# Altium PCB ALio Embedded.PcbDoc (part 1 of 2)
Units mm, origin at the board's own origin, x right, y up, seen from the top; angles counter-clockwise.
Board outline 88.22 x 65.31 mm, 2 copper layers (Top Layer, Bottom Layer); 585 components, 0 nets, 3879 pads, 0 vias.
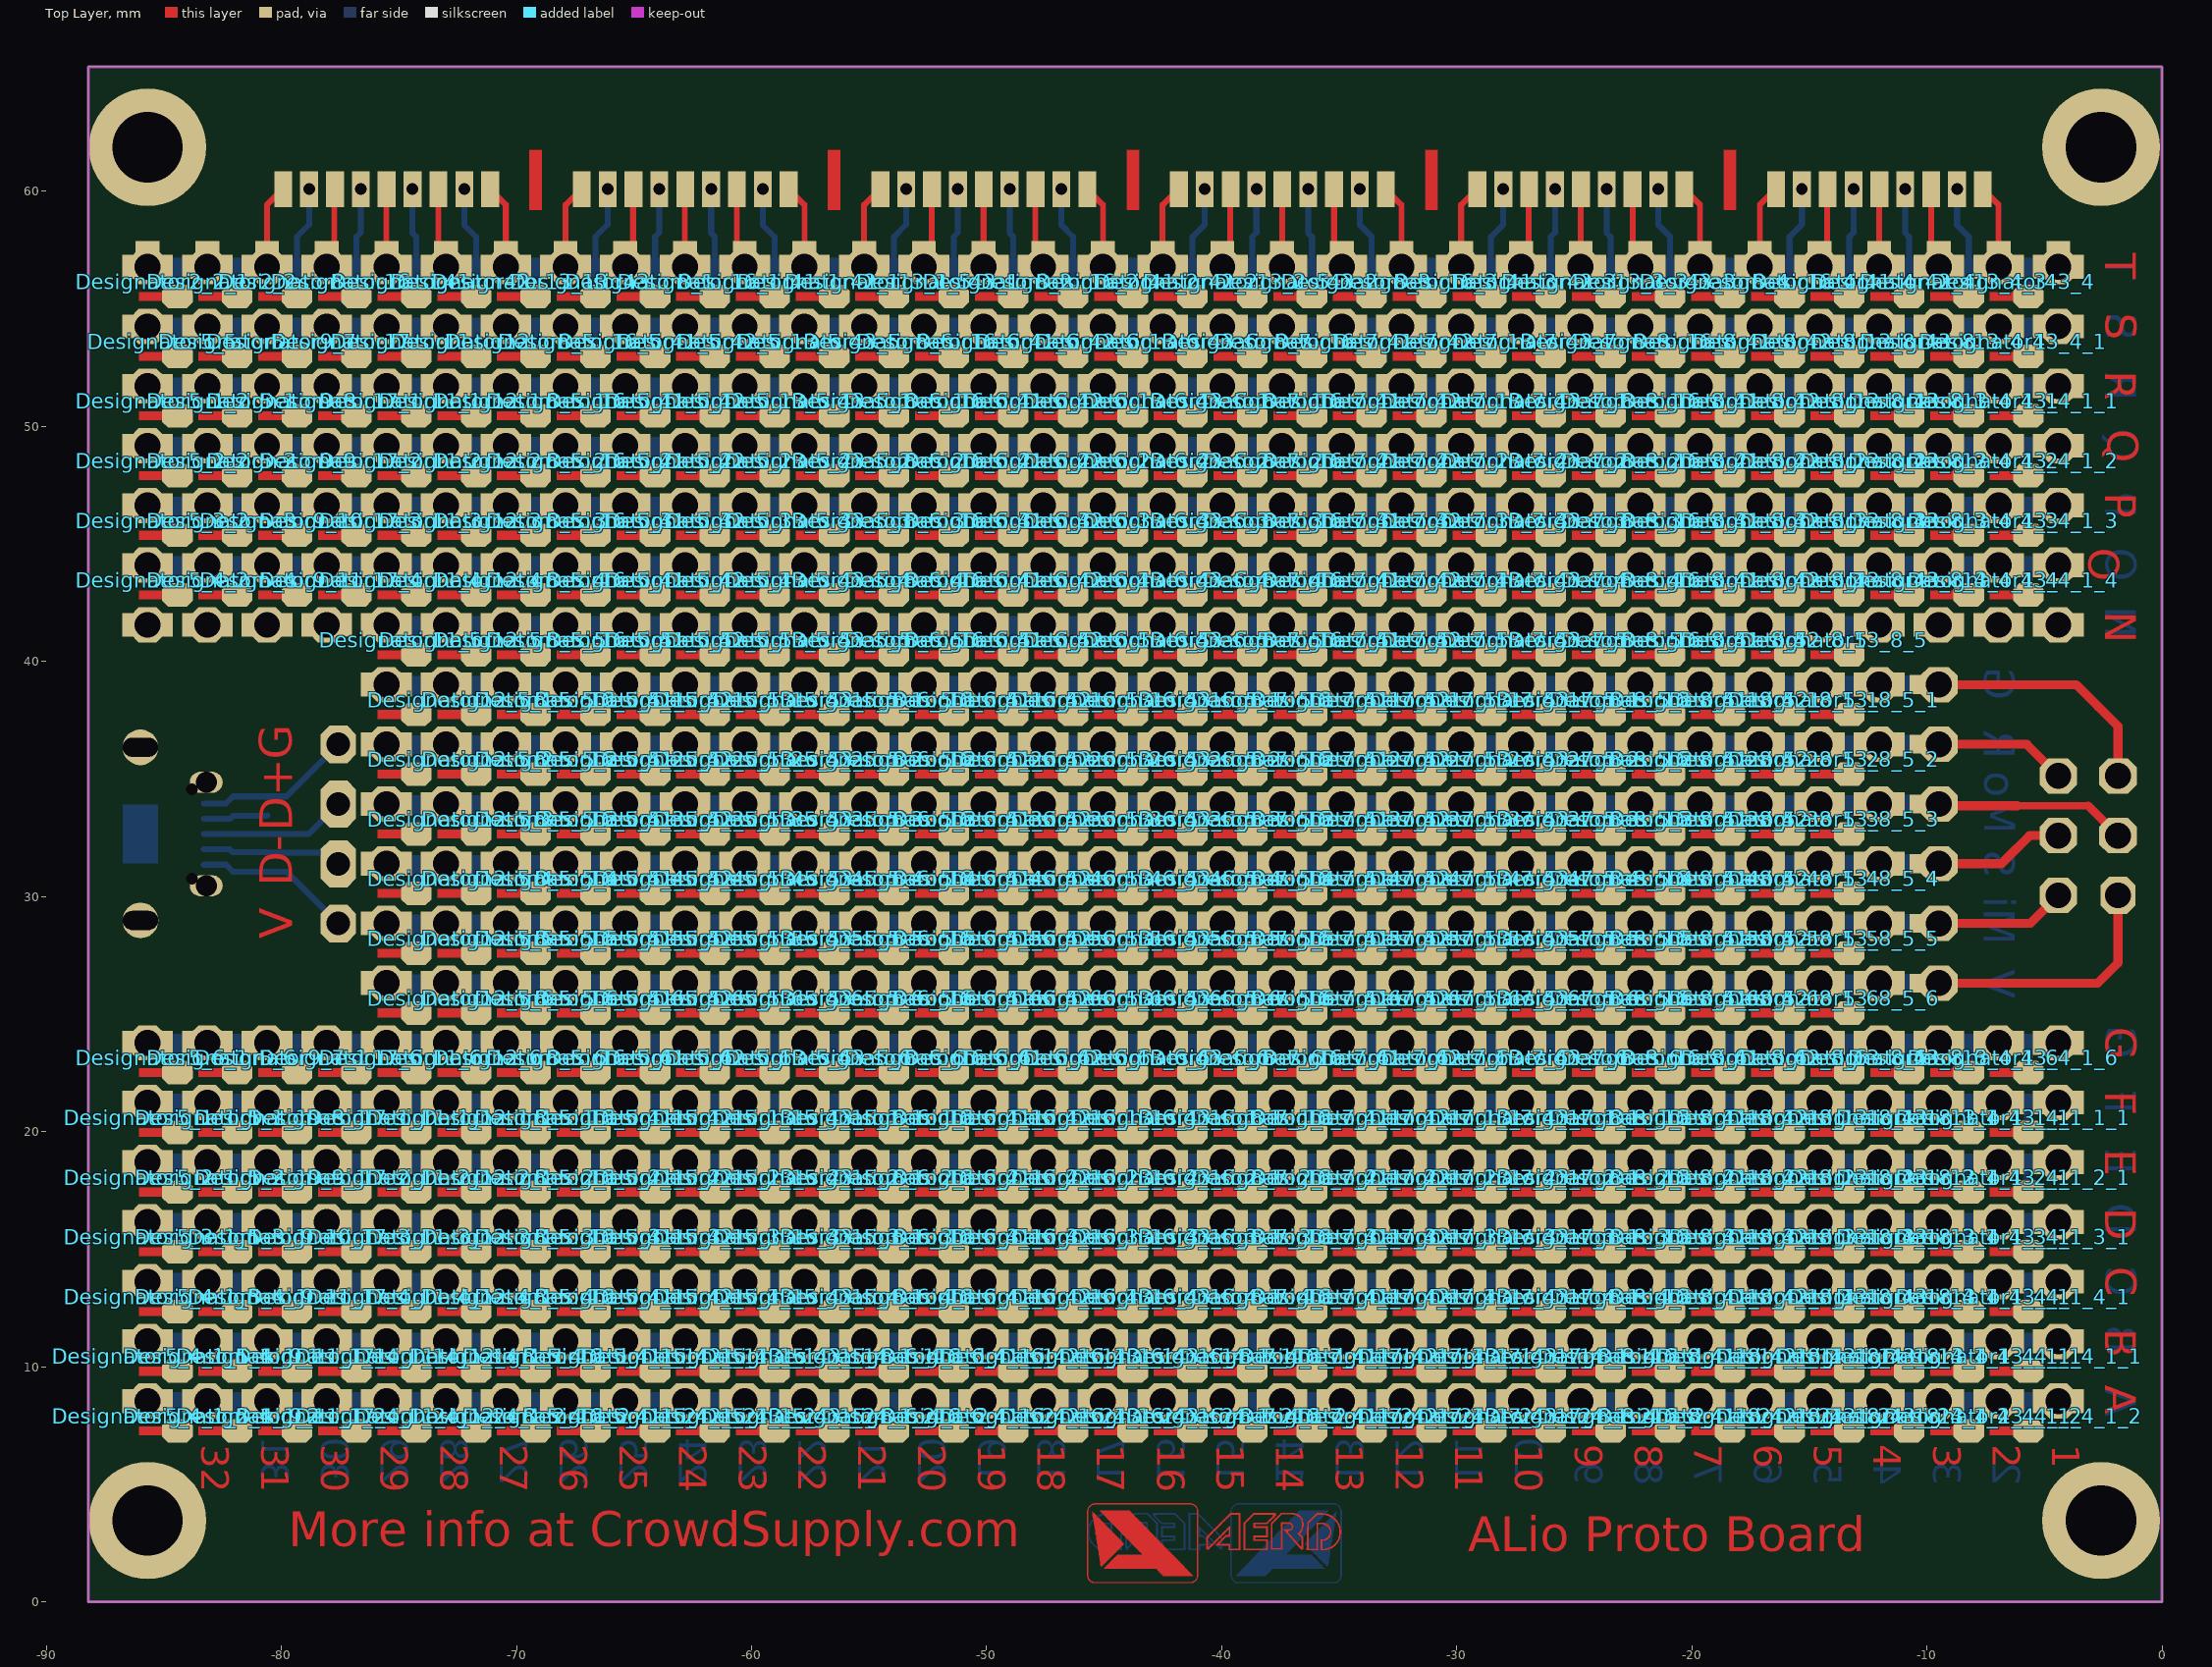
[diagram p0: Top Layer view]
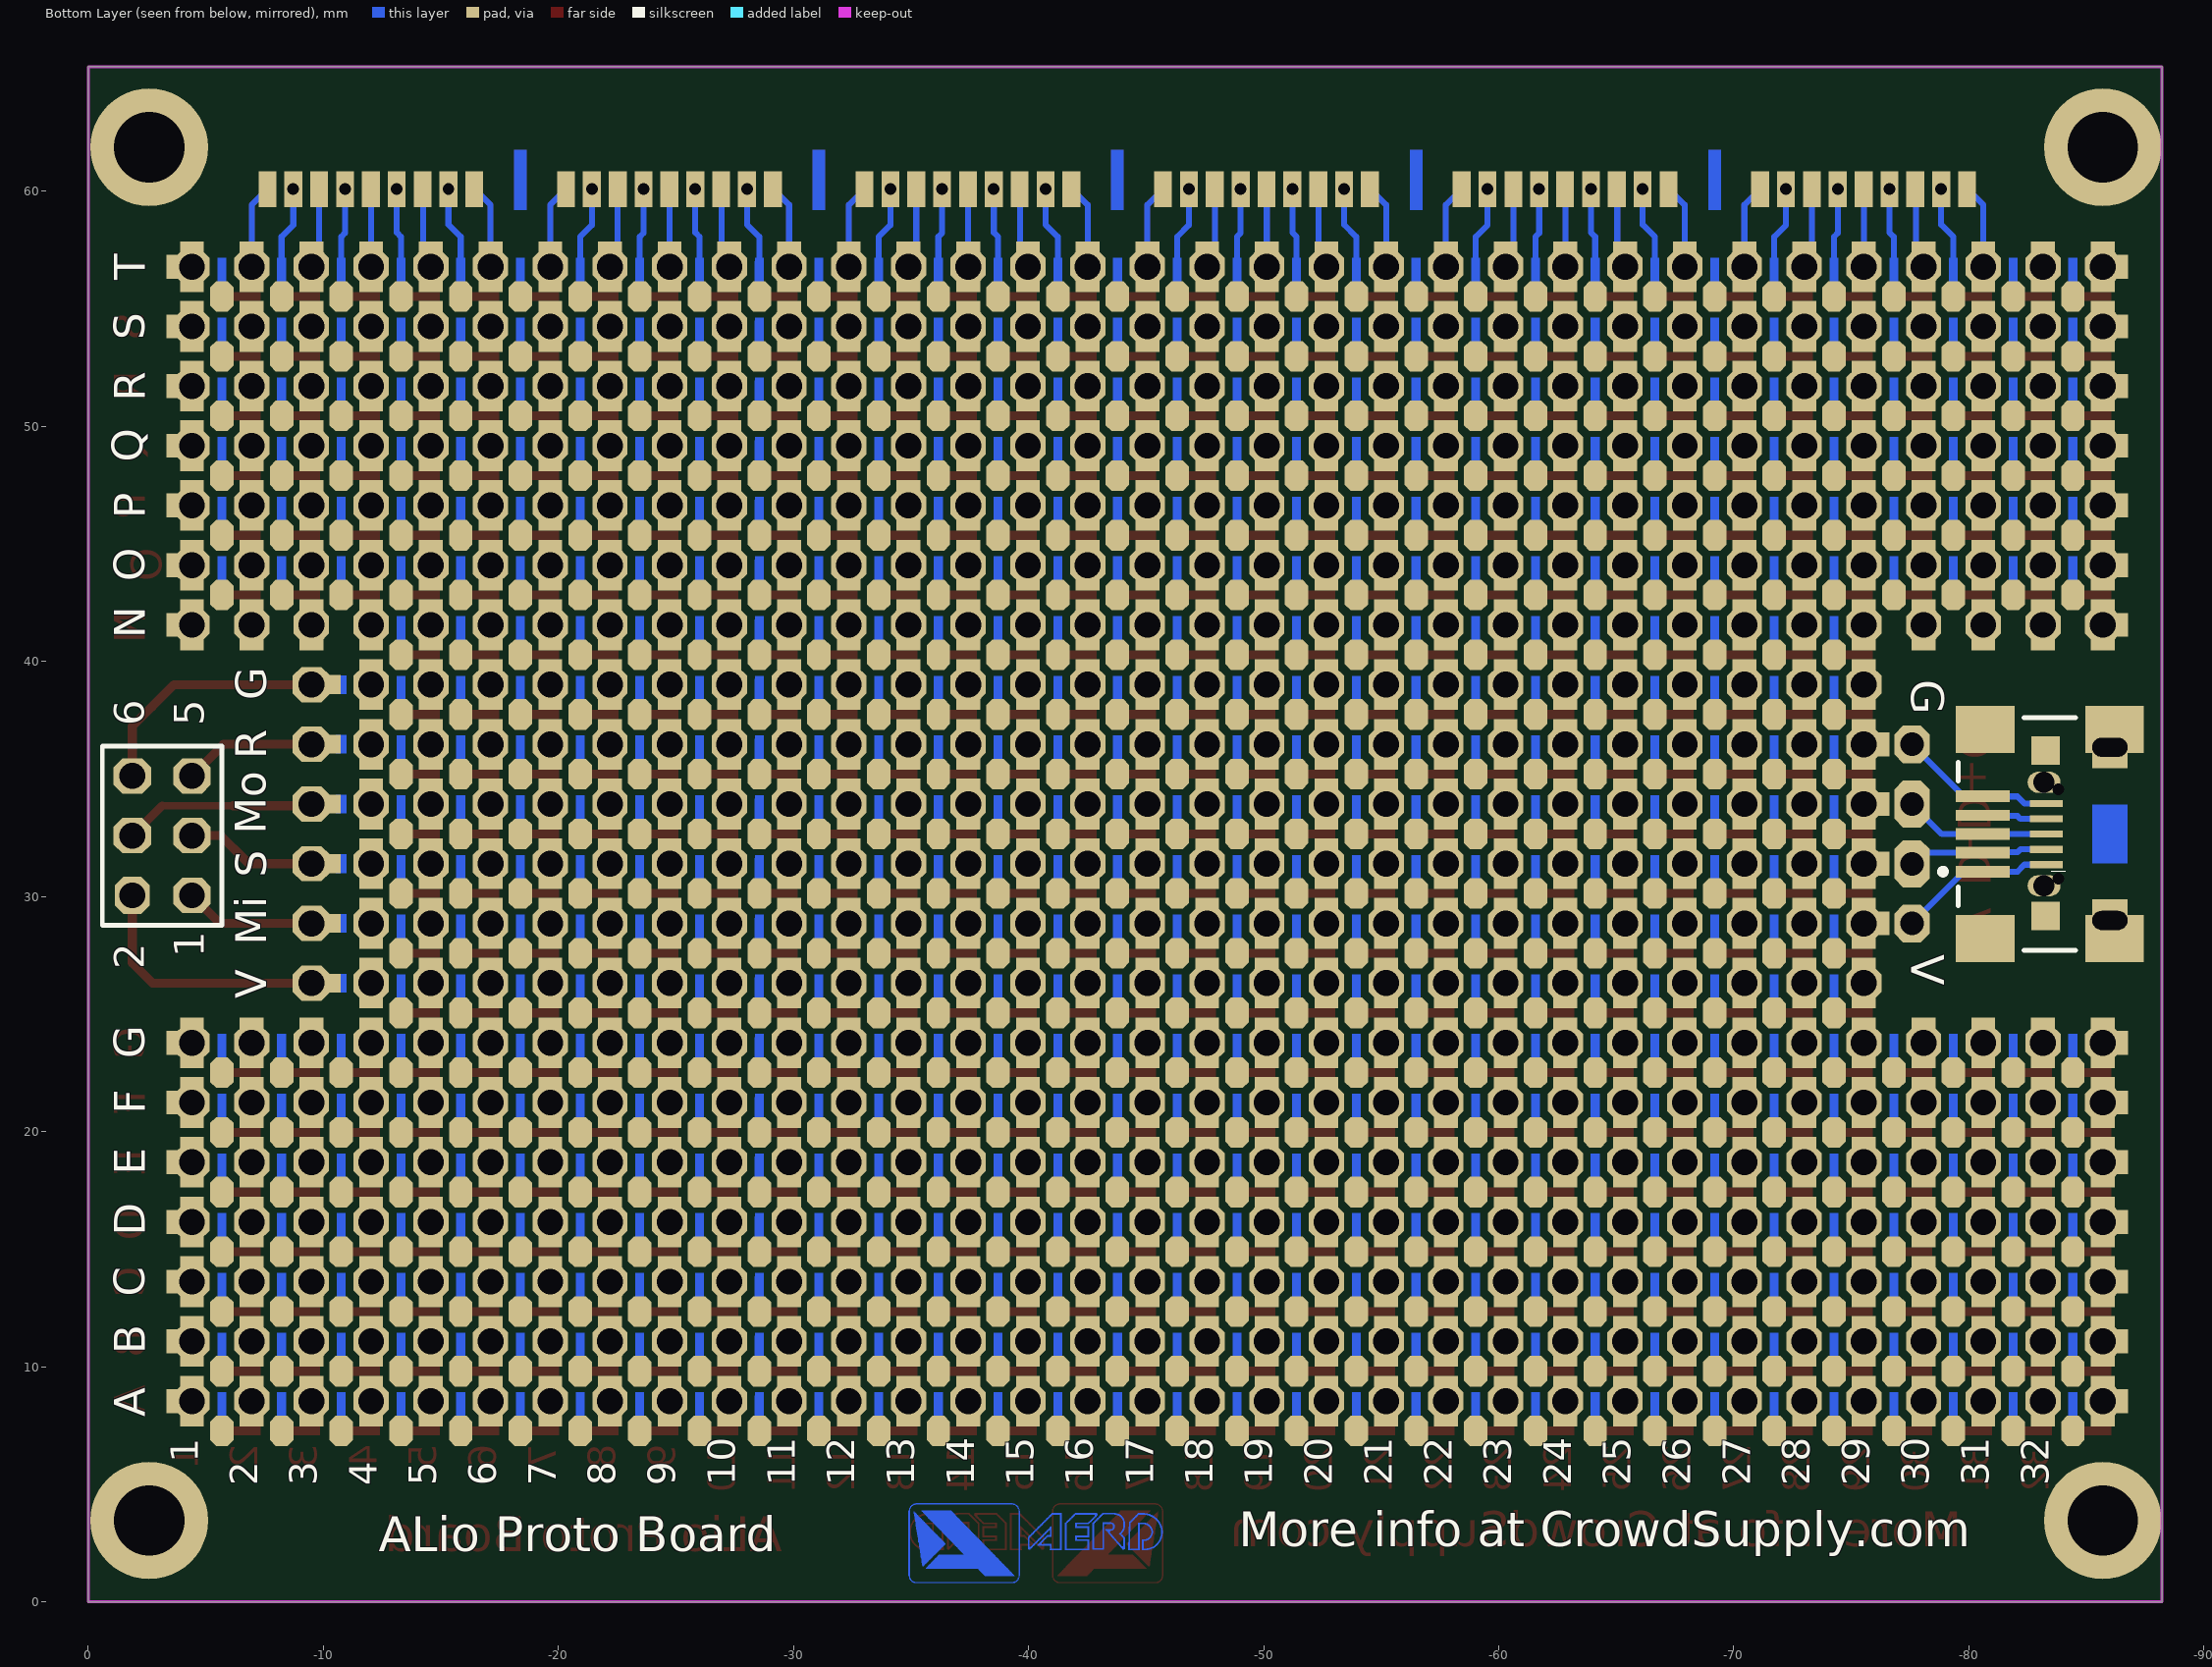
[diagram p1: Bottom Layer view, seen from below]

## Layer stack, top to bottom
Top Layer: signal copper 0.0356
Dielectric: dielectric 0.32, FR-4, Dk 4.8
Bottom Layer: signal copper 0.0356

## Board outline
0,65.31 -88.221,65.31 -88.221,0 0,0 0,17.96 0,65.31

## Design rules (kind name [scope] priority, off if disabled: settings)
Clearance [All] p1 off: gap=0.254
ComponentClearance [All] p1 off: gap=0.254 collisioncheckmode=3 verticalgap=0.254 showdistances=FALSE
HoleToHoleClearance [All] p1 off: gap=0.254 allowstackedmicrovias=TRUE
MinimumSolderMaskSliver [All] p1 off: minsoldermaskwidth=0.254
PlaneConnect [All] p1 off: planeconnectstyle=Relief reliefexpansion=0.508 reliefentries=4 reliefconductorwidth=0.254 reliefairgap=0.254
PolygonConnect [All] p1: connectstyle=Relief reliefconductorwidth=0.254 reliefentries=4 polygonreliefangle="90 Angle"
RoutingVias [All] p1: holewidth=0.711 width=1.27 viastyle="Through Hole" minholewidth=0.711 minwidth=1.27 maxholewidth=0.711 maxwidth=1.27
ShortCircuit [All] p1 off: allowed=FALSE
SilkscreenOverComponentPads [All] p1: minsilkscreentomaskgap=0.254
SolderMaskExpansion [All] p1: expansion=0.102
UnRoutedNet [All] p1 off:
Width [All] p1: maxlimit=0.508 minlimit=0.127 preferedwidth=0.254
21 further rules are at their usual default settings.

## Components (designator, comment, footprint, x,y, rotation, side; value= is the part's Value field where it differs from the comment)
Designator2_2 "Comment" PROTO2WL -83.155,56.8 r0 top
Designator2_2_1 "Comment" PROTO2WL -85.695,56.8 r0 top
Designator5 "Comment" PROTO2WL -83.155,54.26 r0 top
Designator5_1 "Comment" PROTO2WL -83.155,51.72 r0 top
Designator5_1_1 "Comment" PROTO2WL -83.155,21.24 r0 top
Designator5_1_1_1 "Comment" PROTO2WL -85.695,21.24 r0 top
Designator5_1_2 "Comment" PROTO2WL -85.695,51.72 r0 top
Designator5_2 "Comment" PROTO2WL -83.155,49.18 r0 top
Designator5_2_1 "Comment" PROTO2WL -83.155,18.7 r0 top
Designator5_2_1_1 "Comment" PROTO2WL -85.695,18.7 r0 top
Designator5_2_2 "Comment" PROTO2WL -85.695,49.18 r0 top
Designator5_3 "Comment" PROTO2WL -83.155,46.64 r0 top
Designator5_3_1 "Comment" PROTO2WL -83.155,16.16 r0 top
Designator5_3_1_1 "Comment" PROTO2WL -85.695,16.16 r0 top
Designator5_3_2 "Comment" PROTO2WL -85.695,46.64 r0 top
Designator5_4 "Comment" PROTO2WL -83.155,44.1 r0 top
Designator5_4_1 "Comment" PROTO2WL -83.155,13.62 r0 top
Designator5_4_1_1 "Comment" PROTO2WL -83.155,11.08 r0 top
Designator5_4_1_1_1 "Comment" PROTO2WL -85.695,11.08 r0 top
Designator5_4_1_2 "Comment" PROTO2WL -83.155,8.54 r0 top
Designator5_4_1_2_1 "Comment" PROTO2WL -85.695,8.54 r0 top
Designator5_4_1_3 "Comment" PROTO2WL -85.695,13.62 r0 top
Designator5_4_2 "Comment" PROTO2WL -85.695,44.1 r0 top
Designator5_5 "Comment" PROTO2WL -85.695,54.26 r0 top
Designator5_6 "Comment" PROTO2WL -83.155,23.78 r0 top
Designator5_6_1 "Comment" PROTO2WL -85.695,23.78 r0 top
Designator8 "Comment" PROTO2WL -80.615,56.8 r0 top
Designator8_1 "Comment" PROTO2WL -65.375,56.8 r0 top
Designator8_2 "Comment" PROTO2WL -50.135,56.8 r0 top
Designator8_3 "Comment" PROTO2WL -34.895,56.8 r0 top
Designator8_4 "Comment" PROTO2WL -19.655,56.8 r0 top
Designator8_5 "Comment" PROTO2WL -70.455,54.26 r0 top
Designator8_5_1 "Comment" PROTO2WL -70.455,51.72 r0 top
Designator8_5_1_1 "Comment" PROTO2WL -70.455,21.24 r0 top
Designator8_5_2 "Comment" PROTO2WL -70.455,49.18 r0 top
Designator8_5_2_1 "Comment" PROTO2WL -70.455,18.7 r0 top
Designator8_5_3 "Comment" PROTO2WL -70.455,46.64 r0 top
Designator8_5_3_1 "Comment" PROTO2WL -70.455,16.16 r0 top
Designator8_5_4 "Comment" PROTO2WL -70.455,44.1 r0 top
Designator8_5_4_1 "Comment" PROTO2WL -70.455,13.62 r0 top
Designator8_5_4_1_1 "Comment" PROTO2WL -70.455,11.08 r0 top
Designator8_5_4_1_2 "Comment" PROTO2WL -70.455,8.54 r0 top
Designator8_5_5 "Comment" PROTO2WL -70.455,41.56 r0 top
Designator8_5_5_1 "Comment" PROTO2WL -70.455,39.02 r0 top
Designator8_5_5_2 "Comment" PROTO2WL -70.455,36.48 r0 top
Designator8_5_5_3 "Comment" PROTO2WL -70.455,33.94 r0 top
Designator8_5_5_4 "Comment" PROTO2WL -70.455,31.4 r0 top
Designator8_5_5_5 "Comment" PROTO2WL -70.455,28.86 r0 top
Designator8_5_5_6 "Comment" PROTO2WL -70.455,26.32 r0 top
Designator8_5_6 "Comment" PROTO2WL -70.455,23.78 r0 top
Designator8_6 "Comment" PROTO2WL -55.215,54.26 r0 top
Designator8_6_1 "Comment" PROTO2WL -55.215,51.72 r0 top
Designator8_6_1_1 "Comment" PROTO2WL -55.215,21.24 r0 top
Designator8_6_2 "Comment" PROTO2WL -55.215,49.18 r0 top
Designator8_6_2_1 "Comment" PROTO2WL -55.215,18.7 r0 top
Designator8_6_3 "Comment" PROTO2WL -55.215,46.64 r0 top
Designator8_6_3_1 "Comment" PROTO2WL -55.215,16.16 r0 top
Designator8_6_4 "Comment" PROTO2WL -55.215,44.1 r0 top
Designator8_6_4_1 "Comment" PROTO2WL -55.215,13.62 r0 top
Designator8_6_4_1_1 "Comment" PROTO2WL -55.215,11.08 r0 top
Designator8_6_4_1_2 "Comment" PROTO2WL -55.215,8.54 r0 top
Designator8_6_5 "Comment" PROTO2WL -55.215,41.56 r0 top
Designator8_6_5_1 "Comment" PROTO2WL -55.215,39.02 r0 top
Designator8_6_5_2 "Comment" PROTO2WL -55.215,36.48 r0 top
Designator8_6_5_3 "Comment" PROTO2WL -55.215,33.94 r0 top
Designator8_6_5_4 "Comment" PROTO2WL -55.215,31.4 r0 top
Designator8_6_5_5 "Comment" PROTO2WL -55.215,28.86 r0 top
Designator8_6_5_6 "Comment" PROTO2WL -55.215,26.32 r0 top
Designator8_6_6 "Comment" PROTO2WL -55.215,23.78 r0 top
Designator8_7 "Comment" PROTO2WL -39.975,54.26 r0 top
Designator8_7_1 "Comment" PROTO2WL -39.975,51.72 r0 top
Designator8_7_1_1 "Comment" PROTO2WL -39.975,21.24 r0 top
Designator8_7_2 "Comment" PROTO2WL -39.975,49.18 r0 top
Designator8_7_2_1 "Comment" PROTO2WL -39.975,18.7 r0 top
Designator8_7_3 "Comment" PROTO2WL -39.975,46.64 r0 top
Designator8_7_3_1 "Comment" PROTO2WL -39.975,16.16 r0 top
Designator8_7_4 "Comment" PROTO2WL -39.975,44.1 r0 top
Designator8_7_4_1 "Comment" PROTO2WL -39.975,13.62 r0 top
Designator8_7_4_1_1 "Comment" PROTO2WL -39.975,11.08 r0 top
Designator8_7_4_1_2 "Comment" PROTO2WL -39.975,8.54 r0 top
Designator8_7_5 "Comment" PROTO2WL -39.975,41.56 r0 top
Designator8_7_5_1 "Comment" PROTO2WL -39.975,39.02 r0 top
Designator8_7_5_2 "Comment" PROTO2WL -39.975,36.48 r0 top
Designator8_7_5_3 "Comment" PROTO2WL -39.975,33.94 r0 top
Designator8_7_5_4 "Comment" PROTO2WL -39.975,31.4 r0 top
Designator8_7_5_5 "Comment" PROTO2WL -39.975,28.86 r0 top
Designator8_7_5_6 "Comment" PROTO2WL -39.975,26.32 r0 top
Designator8_7_6 "Comment" PROTO2WL -39.975,23.78 r0 top
Designator8_8 "Comment" PROTO2WL -24.735,54.26 r0 top
Designator8_8_1 "Comment" PROTO2WL -24.735,51.72 r0 top
Designator8_8_1_1 "Comment" PROTO2WL -24.735,21.24 r0 top
Designator8_8_2 "Comment" PROTO2WL -24.735,49.18 r0 top
Designator8_8_2_1 "Comment" PROTO2WL -24.735,18.7 r0 top
Designator8_8_3 "Comment" PROTO2WL -24.735,46.64 r0 top
Designator8_8_3_1 "Comment" PROTO2WL -24.735,16.16 r0 top
Designator8_8_4 "Comment" PROTO2WL -24.735,44.1 r0 top
Designator8_8_4_1 "Comment" PROTO2WL -24.735,13.62 r0 top
Designator8_8_4_1_1 "Comment" PROTO2WL -24.735,11.08 r0 top
Designator8_8_4_1_2 "Comment" PROTO2WL -24.735,8.54 r0 top
Designator8_8_5 "Comment" PROTO2WL -24.735,41.56 r0 top
Designator8_8_5_1 "Comment" PROTO2WL -24.735,39.02 r0 top
Designator8_8_5_2 "Comment" PROTO2WL -24.735,36.48 r0 top
Designator8_8_5_3 "Comment" PROTO2WL -24.735,33.94 r0 top
Designator8_8_5_4 "Comment" PROTO2WL -24.735,31.4 r0 top
Designator8_8_5_5 "Comment" PROTO2WL -24.735,28.86 r0 top
Designator8_8_5_6 "Comment" PROTO2WL -24.735,26.32 r0 top
Designator8_8_6 "Comment" PROTO2WL -24.735,23.78 r0 top
Designator9_7 "Comment" PROTO2WL -80.615,54.26 r0 top
Designator9_7_1 "Comment" PROTO2WL -80.615,23.78 r0 top
Designator9_8 "Comment" PROTO2WL -80.615,51.72 r0 top
Designator9_8_1 "Comment" PROTO2WL -80.615,21.24 r0 top
Designator9_9 "Comment" PROTO2WL -80.615,49.18 r0 top
Designator9_9_1 "Comment" PROTO2WL -80.615,18.7 r0 top
Designator9_10 "Comment" PROTO2WL -80.615,46.64 r0 top
Designator9_10_1 "Comment" PROTO2WL -80.615,16.16 r0 top
Designator9_11 "Comment" PROTO2WL -80.615,44.1 r0 top
Designator9_11_1 "Comment" PROTO2WL -80.615,13.62 r0 top
Designator9_11_1_1 "Comment" PROTO2WL -80.615,11.08 r0 top
Designator9_11_1_2 "Comment" PROTO2WL -80.615,8.54 r0 top
Designator11 "Comment" PROTO2WL -75.535,54.26 r0 top
Designator11_1 "Comment" PROTO2WL -75.535,51.72 r0 top
Designator11_1_1 "Comment" PROTO2WL -75.535,21.24 r0 top
Designator11_2 "Comment" PROTO2WL -75.535,49.18 r0 top
Designator11_2_1 "Comment" PROTO2WL -75.535,18.7 r0 top
Designator11_3 "Comment" PROTO2WL -75.535,46.64 r0 top
Designator11_3_1 "Comment" PROTO2WL -75.535,16.16 r0 top
Designator11_4 "Comment" PROTO2WL -75.535,44.1 r0 top
Designator11_4_1 "Comment" PROTO2WL -75.535,13.62 r0 top
Designator11_4_1_1 "Comment" PROTO2WL -75.535,11.08 r0 top
Designator11_4_1_2 "Comment" PROTO2WL -75.535,8.54 r0 top
Designator11_5 "Comment" PROTO2WL -75.535,41.56 r0 top
Designator11_6 "Comment" PROTO2WL -75.535,23.78 r0 top
Designator12 "Comment" PROTO2WL -72.995,54.26 r0 top
Designator12_1 "Comment" PROTO2WL -72.995,51.72 r0 top
Designator12_1_1 "Comment" PROTO2WL -72.995,21.24 r0 top
Designator12_2 "Comment" PROTO2WL -72.995,49.18 r0 top
Designator12_2_1 "Comment" PROTO2WL -72.995,18.7 r0 top
Designator12_3 "Comment" PROTO2WL -72.995,46.64 r0 top
Designator12_3_1 "Comment" PROTO2WL -72.995,16.16 r0 top
Designator12_4 "Comment" PROTO2WL -72.995,44.1 r0 top
Designator12_4_1 "Comment" PROTO2WL -72.995,13.62 r0 top
Designator12_4_1_1 "Comment" PROTO2WL -72.995,11.08 r0 top
Designator12_4_1_2 "Comment" PROTO2WL -72.995,8.54 r0 top
Designator12_5 "Comment" PROTO2WL -72.995,41.56 r0 top
Designator12_5_1 "Comment" PROTO2WL -72.995,39.02 r0 top
Designator12_5_2 "Comment" PROTO2WL -72.995,36.48 r0 top
Designator12_5_3 "Comment" PROTO2WL -72.995,33.94 r0 top
Designator12_5_4 "Comment" PROTO2WL -72.995,31.4 r0 top
Designator12_5_5 "Comment" PROTO2WL -72.995,28.86 r0 top
Designator12_5_6 "Comment" PROTO2WL -72.995,26.32 r0 top
Designator12_6 "Comment" PROTO2WL -72.995,23.78 r0 top
Designator13_1_5 "Comment" PROTO2WL -55.215,56.8 r0 top
Designator13_2_5 "Comment" PROTO2WL -39.975,56.8 r0 top
Designator13_3_3 "Comment" PROTO2WL -24.735,56.8 r0 top
Designator13_4_1 "Comment" PROTO2WL -9.495,54.26 r0 top
Designator13_4_1_1 "Comment" PROTO2WL -9.495,51.72 r0 top
Designator13_4_1_1_1 "Comment" PROTO2WL -9.495,21.24 r0 top
Designator13_4_1_2 "Comment" PROTO2WL -9.495,49.18 r0 top
Designator13_4_1_2_1 "Comment" PROTO2WL -9.495,18.7 r0 top
Designator13_4_1_3 "Comment" PROTO2WL -9.495,46.64 r0 top
Designator13_4_1_3_1 "Comment" PROTO2WL -9.495,16.16 r0 top
Designator13_4_1_4 "Comment" PROTO2WL -9.495,44.1 r0 top
Designator13_4_1_4_1 "Comment" PROTO2WL -9.495,13.62 r0 top
Designator13_4_1_4_1_1 "Comment" PROTO2WL -9.495,11.08 r0 top
Designator13_4_1_4_1_2 "Comment" PROTO2WL -9.495,8.54 r0 top
Designator13_4_1_6 "Comment" PROTO2WL -9.495,23.78 r0 top
Designator13_4_3 "Comment" PROTO2WL -9.495,56.8 r0 top
Designator13_5 "Comment" PROTO2WL -60.295,54.26 r0 top
Designator13_5_1 "Comment" PROTO2WL -60.295,51.72 r0 top
Designator13_5_1_1 "Comment" PROTO2WL -60.295,21.24 r0 top
Designator13_5_2 "Comment" PROTO2WL -60.295,49.18 r0 top
Designator13_5_2_1 "Comment" PROTO2WL -60.295,18.7 r0 top
Designator13_5_3 "Comment" PROTO2WL -60.295,46.64 r0 top
Designator13_5_3_1 "Comment" PROTO2WL -60.295,16.16 r0 top
Designator13_5_4 "Comment" PROTO2WL -60.295,44.1 r0 top
Designator13_5_4_1 "Comment" PROTO2WL -60.295,13.62 r0 top
Designator13_5_4_1_1 "Comment" PROTO2WL -60.295,11.08 r0 top
Designator13_5_4_1_2 "Comment" PROTO2WL -60.295,8.54 r0 top
Designator13_5_5 "Comment" PROTO2WL -60.295,41.56 r0 top
Designator13_5_5_1 "Comment" PROTO2WL -60.295,39.02 r0 top
Designator13_5_5_2 "Comment" PROTO2WL -60.295,36.48 r0 top
Designator13_5_5_3 "Comment" PROTO2WL -60.295,33.94 r0 top
Designator13_5_5_4 "Comment" PROTO2WL -60.295,31.4 r0 top
Designator13_5_5_5 "Comment" PROTO2WL -60.295,28.86 r0 top
Designator13_5_5_6 "Comment" PROTO2WL -60.295,26.32 r0 top
Designator13_5_6 "Comment" PROTO2WL -60.295,23.78 r0 top
Designator13_6 "Comment" PROTO2WL -45.055,54.26 r0 top
Designator13_6_1 "Comment" PROTO2WL -45.055,51.72 r0 top
Designator13_6_1_1 "Comment" PROTO2WL -45.055,21.24 r0 top
Designator13_6_2 "Comment" PROTO2WL -45.055,49.18 r0 top
Designator13_6_2_1 "Comment" PROTO2WL -45.055,18.7 r0 top
Designator13_6_3 "Comment" PROTO2WL -45.055,46.64 r0 top
Designator13_6_3_1 "Comment" PROTO2WL -45.055,16.16 r0 top
Designator13_6_4 "Comment" PROTO2WL -45.055,44.1 r0 top
Designator13_6_4_1 "Comment" PROTO2WL -45.055,13.62 r0 top
Designator13_6_4_1_1 "Comment" PROTO2WL -45.055,11.08 r0 top
Designator13_6_4_1_2 "Comment" PROTO2WL -45.055,8.54 r0 top
Designator13_6_5 "Comment" PROTO2WL -45.055,41.56 r0 top
Designator13_6_5_1 "Comment" PROTO2WL -45.055,39.02 r0 top
Designator13_6_5_2 "Comment" PROTO2WL -45.055,36.48 r0 top
Designator13_6_5_3 "Comment" PROTO2WL -45.055,33.94 r0 top
Designator13_6_5_4 "Comment" PROTO2WL -45.055,31.4 r0 top
Designator13_6_5_5 "Comment" PROTO2WL -45.055,28.86 r0 top
Designator13_6_5_6 "Comment" PROTO2WL -45.055,26.32 r0 top
Designator13_6_6 "Comment" PROTO2WL -45.055,23.78 r0 top
Designator13_7 "Comment" PROTO2WL -29.815,54.26 r0 top
Designator13_7_1 "Comment" PROTO2WL -29.815,51.72 r0 top
Designator13_7_1_1 "Comment" PROTO2WL -29.815,21.24 r0 top
Designator13_7_2 "Comment" PROTO2WL -29.815,49.18 r0 top
Designator13_7_2_1 "Comment" PROTO2WL -29.815,18.7 r0 top
Designator13_7_3 "Comment" PROTO2WL -29.815,46.64 r0 top
Designator13_7_3_1 "Comment" PROTO2WL -29.815,16.16 r0 top
Designator13_7_4 "Comment" PROTO2WL -29.815,44.1 r0 top
Designator13_7_4_1 "Comment" PROTO2WL -29.815,13.62 r0 top
Designator13_7_4_1_1 "Comment" PROTO2WL -29.815,11.08 r0 top
Designator13_7_4_1_2 "Comment" PROTO2WL -29.815,8.54 r0 top
Designator13_7_5 "Comment" PROTO2WL -29.815,41.56 r0 top
Designator13_7_5_1 "Comment" PROTO2WL -29.815,39.02 r0 top
Designator13_7_5_2 "Comment" PROTO2WL -29.815,36.48 r0 top
Designator13_7_5_3 "Comment" PROTO2WL -29.815,33.94 r0 top
Designator13_7_5_4 "Comment" PROTO2WL -29.815,31.4 r0 top
Designator13_7_5_5 "Comment" PROTO2WL -29.815,28.86 r0 top
Designator13_7_5_6 "Comment" PROTO2WL -29.815,26.32 r0 top
Designator13_7_6 "Comment" PROTO2WL -29.815,23.78 r0 top
Designator13_8 "Comment" PROTO2WL -14.575,54.26 r0 top
Designator13_8_1 "Comment" PROTO2WL -14.575,51.72 r0 top
Designator13_8_1_1 "Comment" PROTO2WL -14.575,21.24 r0 top
Designator13_8_2 "Comment" PROTO2WL -14.575,49.18 r0 top
Designator13_8_2_1 "Comment" PROTO2WL -14.575,18.7 r0 top
Designator13_8_3 "Comment" PROTO2WL -14.575,46.64 r0 top
Designator13_8_3_1 "Comment" PROTO2WL -14.575,16.16 r0 top
Designator13_8_4 "Comment" PROTO2WL -14.575,44.1 r0 top
Designator13_8_4_1 "Comment" PROTO2WL -14.575,13.62 r0 top
Designator13_8_4_1_1 "Comment" PROTO2WL -14.575,11.08 r0 top
Designator13_8_4_1_2 "Comment" PROTO2WL -14.575,8.54 r0 top
Designator13_8_5 "Comment" PROTO2WL -14.575,41.56 r0 top
Designator13_8_5_1 "Comment" PROTO2WL -14.575,39.02 r0 top
Designator13_8_5_2 "Comment" PROTO2WL -14.575,36.48 r0 top
Designator13_8_5_3 "Comment" PROTO2WL -14.575,33.94 r0 top
Designator13_8_5_4 "Comment" PROTO2WL -14.575,31.4 r0 top
Designator13_8_5_5 "Comment" PROTO2WL -14.575,28.86 r0 top
Designator13_8_5_6 "Comment" PROTO2WL -14.575,26.32 r0 top
Designator13_8_6 "Comment" PROTO2WL -14.575,23.78 r0 top
Designator13_13 "Comment" PROTO2WL -70.455,56.8 r0 top
Designator16 "Comment" PROTO2WL -78.075,56.8 r0 top
Designator16_1 "Comment" PROTO2WL -62.835,56.8 r0 top
Designator16_2 "Comment" PROTO2WL -47.595,56.8 r0 top
Designator16_3 "Comment" PROTO2WL -32.355,56.8 r0 top
Designator16_4 "Comment" PROTO2WL -17.115,56.8 r0 top
Designator16_5 "Comment" PROTO2WL -67.915,54.26 r0 top
Designator16_5_1 "Comment" PROTO2WL -67.915,51.72 r0 top
Designator16_5_1_1 "Comment" PROTO2WL -67.915,21.24 r0 top
Designator16_5_2 "Comment" PROTO2WL -67.915,49.18 r0 top
Designator16_5_2_1 "Comment" PROTO2WL -67.915,18.7 r0 top
Designator16_5_3 "Comment" PROTO2WL -67.915,46.64 r0 top
Designator16_5_3_1 "Comment" PROTO2WL -67.915,16.16 r0 top
Designator16_5_4 "Comment" PROTO2WL -67.915,44.1 r0 top
Designator16_5_4_1 "Comment" PROTO2WL -67.915,13.62 r0 top
Designator16_5_4_1_1 "Comment" PROTO2WL -67.915,11.08 r0 top
Designator16_5_4_1_2 "Comment" PROTO2WL -67.915,8.54 r0 top
Designator16_5_5 "Comment" PROTO2WL -67.915,41.56 r0 top
Designator16_5_5_1 "Comment" PROTO2WL -67.915,39.02 r0 top
Designator16_5_5_2 "Comment" PROTO2WL -67.915,36.48 r0 top
Designator16_5_5_3 "Comment" PROTO2WL -67.915,33.94 r0 top
Designator16_5_5_4 "Comment" PROTO2WL -67.915,31.4 r0 top
Designator16_5_5_5 "Comment" PROTO2WL -67.915,28.86 r0 top
Designator16_5_5_6 "Comment" PROTO2WL -67.915,26.32 r0 top
Designator16_5_6 "Comment" PROTO2WL -67.915,23.78 r0 top
Designator16_6 "Comment" PROTO2WL -52.675,54.26 r0 top
Designator16_6_1 "Comment" PROTO2WL -52.675,51.72 r0 top
Designator16_6_1_1 "Comment" PROTO2WL -52.675,21.24 r0 top
Designator16_6_2 "Comment" PROTO2WL -52.675,49.18 r0 top
Designator16_6_2_1 "Comment" PROTO2WL -52.675,18.7 r0 top
Designator16_6_3 "Comment" PROTO2WL -52.675,46.64 r0 top
Designator16_6_3_1 "Comment" PROTO2WL -52.675,16.16 r0 top
Designator16_6_4 "Comment" PROTO2WL -52.675,44.1 r0 top
Designator16_6_4_1 "Comment" PROTO2WL -52.675,13.62 r0 top
Designator16_6_4_1_1 "Comment" PROTO2WL -52.675,11.08 r0 top
Designator16_6_4_1_2 "Comment" PROTO2WL -52.675,8.54 r0 top
Designator16_6_5 "Comment" PROTO2WL -52.675,41.56 r0 top
Designator16_6_5_1 "Comment" PROTO2WL -52.675,39.02 r0 top
Designator16_6_5_2 "Comment" PROTO2WL -52.675,36.48 r0 top
Designator16_6_5_3 "Comment" PROTO2WL -52.675,33.94 r0 top
Designator16_6_5_4 "Comment" PROTO2WL -52.675,31.4 r0 top
Designator16_6_5_5 "Comment" PROTO2WL -52.675,28.86 r0 top
Designator16_6_5_6 "Comment" PROTO2WL -52.675,26.32 r0 top
Designator16_6_6 "Comment" PROTO2WL -52.675,23.78 r0 top
Designator16_7 "Comment" PROTO2WL -37.435,54.26 r0 top
Designator16_7_1 "Comment" PROTO2WL -37.435,51.72 r0 top
Designator16_7_1_1 "Comment" PROTO2WL -37.435,21.24 r0 top
Designator16_7_2 "Comment" PROTO2WL -37.435,49.18 r0 top
Designator16_7_2_1 "Comment" PROTO2WL -37.435,18.7 r0 top
Designator16_7_3 "Comment" PROTO2WL -37.435,46.64 r0 top
Designator16_7_3_1 "Comment" PROTO2WL -37.435,16.16 r0 top
Designator16_7_4 "Comment" PROTO2WL -37.435,44.1 r0 top
Designator16_7_4_1 "Comment" PROTO2WL -37.435,13.62 r0 top
Designator16_7_4_1_1 "Comment" PROTO2WL -37.435,11.08 r0 top
Designator16_7_4_1_2 "Comment" PROTO2WL -37.435,8.54 r0 top
Designator16_7_5 "Comment" PROTO2WL -37.435,41.56 r0 top
Designator16_7_5_1 "Comment" PROTO2WL -37.435,39.02 r0 top
Designator16_7_5_2 "Comment" PROTO2WL -37.435,36.48 r0 top
Designator16_7_5_3 "Comment" PROTO2WL -37.435,33.94 r0 top
Designator16_7_5_4 "Comment" PROTO2WL -37.435,31.4 r0 top
Designator16_7_5_5 "Comment" PROTO2WL -37.435,28.86 r0 top
Designator16_7_5_6 "Comment" PROTO2WL -37.435,26.32 r0 top
Designator16_7_6 "Comment" PROTO2WL -37.435,23.78 r0 top
Designator16_8 "Comment" PROTO2WL -22.195,54.26 r0 top
Designator16_8_1 "Comment" PROTO2WL -22.195,51.72 r0 top
Designator16_8_1_1 "Comment" PROTO2WL -22.195,21.24 r0 top
Designator16_8_2 "Comment" PROTO2WL -22.195,49.18 r0 top
Designator16_8_2_1 "Comment" PROTO2WL -22.195,18.7 r0 top
Designator16_8_3 "Comment" PROTO2WL -22.195,46.64 r0 top
Designator16_8_3_1 "Comment" PROTO2WL -22.195,16.16 r0 top
Designator16_8_4 "Comment" PROTO2WL -22.195,44.1 r0 top
Designator16_8_4_1 "Comment" PROTO2WL -22.195,13.62 r0 top
Designator16_8_4_1_1 "Comment" PROTO2WL -22.195,11.08 r0 top
Designator16_8_4_1_2 "Comment" PROTO2WL -22.195,8.54 r0 top
Designator16_8_5 "Comment" PROTO2WL -22.195,41.56 r0 top
Designator16_8_5_1 "Comment" PROTO2WL -22.195,39.02 r0 top
Designator16_8_5_2 "Comment" PROTO2WL -22.195,36.48 r0 top
Designator16_8_5_3 "Comment" PROTO2WL -22.195,33.94 r0 top
Designator16_8_5_4 "Comment" PROTO2WL -22.195,31.4 r0 top
Designator16_8_5_5 "Comment" PROTO2WL -22.195,28.86 r0 top
Designator16_8_5_6 "Comment" PROTO2WL -22.195,26.32 r0 top
Designator16_8_6 "Comment" PROTO2WL -22.195,23.78 r0 top
Designator17 "Comment" PROTO2WL -78.075,54.26 r0 top
Designator17_1 "Comment" PROTO2WL -78.075,51.72 r0 top
Designator17_1_1 "Comment" PROTO2WL -78.075,21.24 r0 top
Designator17_2 "Comment" PROTO2WL -78.075,49.18 r0 top
Designator17_2_1 "Comment" PROTO2WL -78.075,18.7 r0 top
Designator17_3 "Comment" PROTO2WL -78.075,46.64 r0 top
Designator17_3_1 "Comment" PROTO2WL -78.075,16.16 r0 top
Designator17_4 "Comment" PROTO2WL -78.075,44.1 r0 top
Designator17_4_1 "Comment" PROTO2WL -78.075,13.62 r0 top
Designator17_4_1_1 "Comment" PROTO2WL -78.075,11.08 r0 top
Designator17_4_1_2 "Comment" PROTO2WL -78.075,8.54 r0 top
Designator17_6 "Comment" PROTO2WL -78.075,23.78 r0 top
Designator41 "Comment" PROTO2WL -75.535,56.8 r0 top
Designator41_1 "Comment" PROTO2WL -60.295,56.8 r0 top
Designator41_2 "Comment" PROTO2WL -45.055,56.8 r0 top
Designator41_3 "Comment" PROTO2WL -29.815,56.8 r0 top
Designator41_4 "Comment" PROTO2WL -14.575,56.8 r0 top
Designator41_5 "Comment" PROTO2WL -65.375,54.26 r0 top
Designator41_5_1 "Comment" PROTO2WL -65.375,51.72 r0 top
Designator41_5_1_1 "Comment" PROTO2WL -65.375,21.24 r0 top
Designator41_5_2 "Comment" PROTO2WL -65.375,49.18 r0 top
Designator41_5_2_1 "Comment" PROTO2WL -65.375,18.7 r0 top
Designator41_5_3 "Comment" PROTO2WL -65.375,46.64 r0 top
Designator41_5_3_1 "Comment" PROTO2WL -65.375,16.16 r0 top
Designator41_5_4 "Comment" PROTO2WL -65.375,44.1 r0 top
Designator41_5_4_1 "Comment" PROTO2WL -65.375,13.62 r0 top
Designator41_5_4_1_1 "Comment" PROTO2WL -65.375,11.08 r0 top
Designator41_5_4_1_2 "Comment" PROTO2WL -65.375,8.54 r0 top
Designator41_5_5 "Comment" PROTO2WL -65.375,41.56 r0 top
Designator41_5_5_1 "Comment" PROTO2WL -65.375,39.02 r0 top
Designator41_5_5_2 "Comment" PROTO2WL -65.375,36.48 r0 top
Designator41_5_5_3 "Comment" PROTO2WL -65.375,33.94 r0 top
Designator41_5_5_4 "Comment" PROTO2WL -65.375,31.4 r0 top
Designator41_5_5_5 "Comment" PROTO2WL -65.375,28.86 r0 top
Designator41_5_5_6 "Comment" PROTO2WL -65.375,26.32 r0 top
Designator41_5_6 "Comment" PROTO2WL -65.375,23.78 r0 top
Designator41_6 "Comment" PROTO2WL -50.135,54.26 r0 top
Designator41_6_1 "Comment" PROTO2WL -50.135,51.72 r0 top
Designator41_6_1_1 "Comment" PROTO2WL -50.135,21.24 r0 top
Designator41_6_2 "Comment" PROTO2WL -50.135,49.18 r0 top
Designator41_6_2_1 "Comment" PROTO2WL -50.135,18.7 r0 top
Designator41_6_3 "Comment" PROTO2WL -50.135,46.64 r0 top
Designator41_6_3_1 "Comment" PROTO2WL -50.135,16.16 r0 top
Designator41_6_4 "Comment" PROTO2WL -50.135,44.1 r0 top
Designator41_6_4_1 "Comment" PROTO2WL -50.135,13.62 r0 top
Designator41_6_4_1_1 "Comment" PROTO2WL -50.135,11.08 r0 top
Designator41_6_4_1_2 "Comment" PROTO2WL -50.135,8.54 r0 top
Designator41_6_5 "Comment" PROTO2WL -50.135,41.56 r0 top
Designator41_6_5_1 "Comment" PROTO2WL -50.135,39.02 r0 top
Designator41_6_5_2 "Comment" PROTO2WL -50.135,36.48 r0 top
Designator41_6_5_3 "Comment" PROTO2WL -50.135,33.94 r0 top
Designator41_6_5_4 "Comment" PROTO2WL -50.135,31.4 r0 top
Designator41_6_5_5 "Comment" PROTO2WL -50.135,28.86 r0 top
Designator41_6_5_6 "Comment" PROTO2WL -50.135,26.32 r0 top
Designator41_6_6 "Comment" PROTO2WL -50.135,23.78 r0 top
Designator41_7 "Comment" PROTO2WL -34.895,54.26 r0 top
Designator41_7_1 "Comment" PROTO2WL -34.895,51.72 r0 top
Designator41_7_1_1 "Comment" PROTO2WL -34.895,21.24 r0 top
Designator41_7_2 "Comment" PROTO2WL -34.895,49.18 r0 top
Designator41_7_2_1 "Comment" PROTO2WL -34.895,18.7 r0 top
Designator41_7_3 "Comment" PROTO2WL -34.895,46.64 r0 top
Designator41_7_3_1 "Comment" PROTO2WL -34.895,16.16 r0 top
Designator41_7_4 "Comment" PROTO2WL -34.895,44.1 r0 top
Designator41_7_4_1 "Comment" PROTO2WL -34.895,13.62 r0 top
Designator41_7_4_1_1 "Comment" PROTO2WL -34.895,11.08 r0 top
Designator41_7_4_1_2 "Comment" PROTO2WL -34.895,8.54 r0 top
Designator41_7_5 "Comment" PROTO2WL -34.895,41.56 r0 top
Designator41_7_5_1 "Comment" PROTO2WL -34.895,39.02 r0 top
Designator41_7_5_2 "Comment" PROTO2WL -34.895,36.48 r0 top
Designator41_7_5_3 "Comment" PROTO2WL -34.895,33.94 r0 top
Designator41_7_5_4 "Comment" PROTO2WL -34.895,31.4 r0 top
Designator41_7_5_5 "Comment" PROTO2WL -34.895,28.86 r0 top
Designator41_7_5_6 "Comment" PROTO2WL -34.895,26.32 r0 top
Designator41_7_6 "Comment" PROTO2WL -34.895,23.78 r0 top
Designator41_8 "Comment" PROTO2WL -19.655,54.26 r0 top
Designator41_8_1 "Comment" PROTO2WL -19.655,51.72 r0 top
Designator41_8_1_1 "Comment" PROTO2WL -19.655,21.24 r0 top
Designator41_8_2 "Comment" PROTO2WL -19.655,49.18 r0 top
Designator41_8_2_1 "Comment" PROTO2WL -19.655,18.7 r0 top
Designator41_8_3 "Comment" PROTO2WL -19.655,46.64 r0 top
Designator41_8_3_1 "Comment" PROTO2WL -19.655,16.16 r0 top
Designator41_8_4 "Comment" PROTO2WL -19.655,44.1 r0 top
Designator41_8_4_1 "Comment" PROTO2WL -19.655,13.62 r0 top
Designator41_8_4_1_1 "Comment" PROTO2WL -19.655,11.08 r0 top
Designator41_8_4_1_2 "Comment" PROTO2WL -19.655,8.54 r0 top
Designator41_8_5 "Comment" PROTO2WL -19.655,41.56 r0 top
Designator41_8_5_1 "Comment" PROTO2WL -19.655,39.02 r0 top
Designator41_8_5_2 "Comment" PROTO2WL -19.655,36.48 r0 top
Designator41_8_5_3 "Comment" PROTO2WL -19.655,33.94 r0 top
Designator41_8_5_4 "Comment" PROTO2WL -19.655,31.4 r0 top
Designator41_8_5_5 "Comment" PROTO2WL -19.655,28.86 r0 top
Designator41_8_5_6 "Comment" PROTO2WL -19.655,26.32 r0 top
Designator41_8_6 "Comment" PROTO2WL -19.655,23.78 r0 top
Designator42 "Comment" PROTO2WL -72.995,56.8 r0 top
Designator42_1 "Comment" PROTO2WL -57.755,56.8 r0 top
Designator42_2 "Comment" PROTO2WL -42.515,56.8 r0 top
Designator42_3 "Comment" PROTO2WL -27.275,56.8 r0 top
Designator42_4 "Comment" PROTO2WL -12.035,56.8 r0 top
Designator42_5 "Comment" PROTO2WL -62.835,54.26 r0 top
Designator42_5_1 "Comment" PROTO2WL -62.835,51.72 r0 top
Designator42_5_1_1 "Comment" PROTO2WL -62.835,21.24 r0 top
Designator42_5_2 "Comment" PROTO2WL -62.835,49.18 r0 top
Designator42_5_2_1 "Comment" PROTO2WL -62.835,18.7 r0 top
Designator42_5_3 "Comment" PROTO2WL -62.835,46.64 r0 top
Designator42_5_3_1 "Comment" PROTO2WL -62.835,16.16 r0 top
Designator42_5_4 "Comment" PROTO2WL -62.835,44.1 r0 top
Designator42_5_4_1 "Comment" PROTO2WL -62.835,13.62 r0 top
Designator42_5_4_1_1 "Comment" PROTO2WL -62.835,11.08 r0 top
Designator42_5_4_1_2 "Comment" PROTO2WL -62.835,8.54 r0 top
Designator42_5_5 "Comment" PROTO2WL -62.835,41.56 r0 top
Designator42_5_5_1 "Comment" PROTO2WL -62.835,39.02 r0 top
Designator42_5_5_2 "Comment" PROTO2WL -62.835,36.48 r0 top
Designator42_5_5_3 "Comment" PROTO2WL -62.835,33.94 r0 top
Designator42_5_5_4 "Comment" PROTO2WL -62.835,31.4 r0 top
Designator42_5_5_5 "Comment" PROTO2WL -62.835,28.86 r0 top
Designator42_5_5_6 "Comment" PROTO2WL -62.835,26.32 r0 top
Designator42_5_6 "Comment" PROTO2WL -62.835,23.78 r0 top
Designator42_6 "Comment" PROTO2WL -47.595,54.26 r0 top
Designator42_6_1 "Comment" PROTO2WL -47.595,51.72 r0 top
Designator42_6_1_1 "Comment" PROTO2WL -47.595,21.24 r0 top
Designator42_6_2 "Comment" PROTO2WL -47.595,49.18 r0 top
Designator42_6_2_1 "Comment" PROTO2WL -47.595,18.7 r0 top
Designator42_6_3 "Comment" PROTO2WL -47.595,46.64 r0 top
Designator42_6_3_1 "Comment" PROTO2WL -47.595,16.16 r0 top
Designator42_6_4 "Comment" PROTO2WL -47.595,44.1 r0 top
Designator42_6_4_1 "Comment" PROTO2WL -47.595,13.62 r0 top
Designator42_6_4_1_1 "Comment" PROTO2WL -47.595,11.08 r0 top
Designator42_6_4_1_2 "Comment" PROTO2WL -47.595,8.54 r0 top
Designator42_6_5 "Comment" PROTO2WL -47.595,41.56 r0 top
Designator42_6_5_1 "Comment" PROTO2WL -47.595,39.02 r0 top
Designator42_6_5_2 "Comment" PROTO2WL -47.595,36.48 r0 top
Designator42_6_5_3 "Comment" PROTO2WL -47.595,33.94 r0 top
Designator42_6_5_4 "Comment" PROTO2WL -47.595,31.4 r0 top
Designator42_6_5_5 "Comment" PROTO2WL -47.595,28.86 r0 top
Designator42_6_5_6 "Comment" PROTO2WL -47.595,26.32 r0 top
Designator42_6_6 "Comment" PROTO2WL -47.595,23.78 r0 top
Designator42_7 "Comment" PROTO2WL -32.355,54.26 r0 top
Designator42_7_1 "Comment" PROTO2WL -32.355,51.72 r0 top
Designator42_7_1_1 "Comment" PROTO2WL -32.355,21.24 r0 top
Designator42_7_2 "Comment" PROTO2WL -32.355,49.18 r0 top
Designator42_7_2_1 "Comment" PROTO2WL -32.355,18.7 r0 top
Designator42_7_3 "Comment" PROTO2WL -32.355,46.64 r0 top
Designator42_7_3_1 "Comment" PROTO2WL -32.355,16.16 r0 top
Designator42_7_4 "Comment" PROTO2WL -32.355,44.1 r0 top
Designator42_7_4_1 "Comment" PROTO2WL -32.355,13.62 r0 top
Designator42_7_4_1_1 "Comment" PROTO2WL -32.355,11.08 r0 top
Designator42_7_4_1_2 "Comment" PROTO2WL -32.355,8.54 r0 top
Designator42_7_5 "Comment" PROTO2WL -32.355,41.56 r0 top
Designator42_7_5_1 "Comment" PROTO2WL -32.355,39.02 r0 top
Designator42_7_5_2 "Comment" PROTO2WL -32.355,36.48 r0 top
Designator42_7_5_3 "Comment" PROTO2WL -32.355,33.94 r0 top
Designator42_7_5_4 "Comment" PROTO2WL -32.355,31.4 r0 top
Designator42_7_5_5 "Comment" PROTO2WL -32.355,28.86 r0 top
Designator42_7_5_6 "Comment" PROTO2WL -32.355,26.32 r0 top
Designator42_7_6 "Comment" PROTO2WL -32.355,23.78 r0 top
Designator42_8 "Comment" PROTO2WL -17.115,54.26 r0 top
Designator42_8_1 "Comment" PROTO2WL -17.115,51.72 r0 top
Designator42_8_1_1 "Comment" PROTO2WL -17.115,21.24 r0 top
Designator42_8_2 "Comment" PROTO2WL -17.115,49.18 r0 top
Designator42_8_2_1 "Comment" PROTO2WL -17.115,18.7 r0 top
Designator42_8_3 "Comment" PROTO2WL -17.115,46.64 r0 top
Designator42_8_3_1 "Comment" PROTO2WL -17.115,16.16 r0 top
Designator42_8_4 "Comment" PROTO2WL -17.115,44.1 r0 top
Designator42_8_4_1 "Comment" PROTO2WL -17.115,13.62 r0 top
Designator42_8_4_1_1 "Comment" PROTO2WL -17.115,11.08 r0 top
Designator42_8_4_1_2 "Comment" PROTO2WL -17.115,8.54 r0 top
Designator42_8_5 "Comment" PROTO2WL -17.115,41.56 r0 top
Designator42_8_5_1 "Comment" PROTO2WL -17.115,39.02 r0 top
Designator42_8_5_2 "Comment" PROTO2WL -17.115,36.48 r0 top
Designator42_8_5_3 "Comment" PROTO2WL -17.115,33.94 r0 top
Designator42_8_5_4 "Comment" PROTO2WL -17.115,31.4 r0 top
Designator42_8_5_5 "Comment" PROTO2WL -17.115,28.86 r0 top
Designator42_8_5_6 "Comment" PROTO2WL -17.115,26.32 r0 top
Designator42_8_6 "Comment" PROTO2WL -17.115,23.78 r0 top
Designator43 "Comment" PROTO2WL -67.915,56.8 r0 top
Designator43_1 "Comment" PROTO2WL -52.675,56.8 r0 top
Designator43_2 "Comment" PROTO2WL -37.435,56.8 r0 top
Designator43_3 "Comment" PROTO2WL -22.195,56.8 r0 top
Designator43_4 "Comment" PROTO2WL -6.955,56.8 r0 top
Designator43_4_1 "Comment" PROTO2WL -6.955,54.26 r0 top
Designator43_4_1_1 "Comment" PROTO2WL -6.955,51.72 r0 top
Designator43_4_1_1_1 "Comment" PROTO2WL -6.955,21.24 r0 top
Designator43_4_1_2 "Comment" PROTO2WL -6.955,49.18 r0 top
Designator43_4_1_2_1 "Comment" PROTO2WL -6.955,18.7 r0 top
Designator43_4_1_3 "Comment" PROTO2WL -6.955,46.64 r0 top
Designator43_4_1_3_1 "Comment" PROTO2WL -6.955,16.16 r0 top
Designator43_4_1_4 "Comment" PROTO2WL -6.955,44.1 r0 top
Designator43_4_1_4_1 "Comment" PROTO2WL -6.955,13.62 r0 top
Designator43_4_1_4_1_1 "Comment" PROTO2WL -6.955,11.08 r0 top
Designator43_4_1_4_1_2 "Comment" PROTO2WL -6.955,8.54 r0 top
Designator43_4_1_6 "Comment" PROTO2WL -6.955,23.78 r0 top
Designator43_5 "Comment" PROTO2WL -57.755,54.26 r0 top
Designator43_5_1 "Comment" PROTO2WL -57.755,51.72 r0 top
Designator43_5_1_1 "Comment" PROTO2WL -57.755,21.24 r0 top
Designator43_5_2 "Comment" PROTO2WL -57.755,49.18 r0 top
Designator43_5_2_1 "Comment" PROTO2WL -57.755,18.7 r0 top
Designator43_5_3 "Comment" PROTO2WL -57.755,46.64 r0 top
Designator43_5_3_1 "Comment" PROTO2WL -57.755,16.16 r0 top
Designator43_5_4 "Comment" PROTO2WL -57.755,44.1 r0 top
Designator43_5_4_1 "Comment" PROTO2WL -57.755,13.62 r0 top
Designator43_5_4_1_1 "Comment" PROTO2WL -57.755,11.08 r0 top
Designator43_5_4_1_2 "Comment" PROTO2WL -57.755,8.54 r0 top
Designator43_5_5 "Comment" PROTO2WL -57.755,41.56 r0 top
Designator43_5_5_1 "Comment" PROTO2WL -57.755,39.02 r0 top
Designator43_5_5_2 "Comment" PROTO2WL -57.755,36.48 r0 top
Designator43_5_5_3 "Comment" PROTO2WL -57.755,33.94 r0 top
Designator43_5_5_4 "Comment" PROTO2WL -57.755,31.4 r0 top
Designator43_5_5_5 "Comment" PROTO2WL -57.755,28.86 r0 top
Designator43_5_5_6 "Comment" PROTO2WL -57.755,26.32 r0 top
Designator43_5_6 "Comment" PROTO2WL -57.755,23.78 r0 top
Designator43_6 "Comment" PROTO2WL -42.515,54.26 r0 top
Designator43_6_1 "Comment" PROTO2WL -42.515,51.72 r0 top
Designator43_6_1_1 "Comment" PROTO2WL -42.515,21.24 r0 top
Designator43_6_2 "Comment" PROTO2WL -42.515,49.18 r0 top
Designator43_6_2_1 "Comment" PROTO2WL -42.515,18.7 r0 top
Designator43_6_3 "Comment" PROTO2WL -42.515,46.64 r0 top
Designator43_6_3_1 "Comment" PROTO2WL -42.515,16.16 r0 top
Designator43_6_4 "Comment" PROTO2WL -42.515,44.1 r0 top
Designator43_6_4_1 "Comment" PROTO2WL -42.515,13.62 r0 top
Designator43_6_4_1_1 "Comment" PROTO2WL -42.515,11.08 r0 top
Designator43_6_4_1_2 "Comment" PROTO2WL -42.515,8.54 r0 top
Designator43_6_5 "Comment" PROTO2WL -42.515,41.56 r0 top
Designator43_6_5_1 "Comment" PROTO2WL -42.515,39.02 r0 top
Designator43_6_5_2 "Comment" PROTO2WL -42.515,36.48 r0 top
Designator43_6_5_3 "Comment" PROTO2WL -42.515,33.94 r0 top
Designator43_6_5_4 "Comment" PROTO2WL -42.515,31.4 r0 top
Designator43_6_5_5 "Comment" PROTO2WL -42.515,28.86 r0 top
Designator43_6_5_6 "Comment" PROTO2WL -42.515,26.32 r0 top
Designator43_6_6 "Comment" PROTO2WL -42.515,23.78 r0 top
Designator43_7 "Comment" PROTO2WL -27.275,54.26 r0 top
Designator43_7_1 "Comment" PROTO2WL -27.275,51.72 r0 top
Designator43_7_1_1 "Comment" PROTO2WL -27.275,21.24 r0 top
Designator43_7_2 "Comment" PROTO2WL -27.275,49.18 r0 top
Designator43_7_2_1 "Comment" PROTO2WL -27.275,18.7 r0 top
Designator43_7_3 "Comment" PROTO2WL -27.275,46.64 r0 top
Designator43_7_3_1 "Comment" PROTO2WL -27.275,16.16 r0 top
Designator43_7_4 "Comment" PROTO2WL -27.275,44.1 r0 top
Designator43_7_4_1 "Comment" PROTO2WL -27.275,13.62 r0 top
Designator43_7_4_1_1 "Comment" PROTO2WL -27.275,11.08 r0 top
Designator43_7_4_1_2 "Comment" PROTO2WL -27.275,8.54 r0 top
Designator43_7_5 "Comment" PROTO2WL -27.275,41.56 r0 top
Designator43_7_5_1 "Comment" PROTO2WL -27.275,39.02 r0 top
Designator43_7_5_2 "Comment" PROTO2WL -27.275,36.48 r0 top
Designator43_7_5_3 "Comment" PROTO2WL -27.275,33.94 r0 top
Designator43_7_5_4 "Comment" PROTO2WL -27.275,31.4 r0 top
Designator43_7_5_5 "Comment" PROTO2WL -27.275,28.86 r0 top
Designator43_7_5_6 "Comment" PROTO2WL -27.275,26.32 r0 top
Designator43_7_6 "Comment" PROTO2WL -27.275,23.78 r0 top
Designator43_8 "Comment" PROTO2WL -12.035,54.26 r0 top
Designator43_8_1 "Comment" PROTO2WL -12.035,51.72 r0 top
Designator43_8_1_1 "Comment" PROTO2WL -12.035,21.24 r0 top
Designator43_8_2 "Comment" PROTO2WL -12.035,49.18 r0 top
Designator43_8_2_1 "Comment" PROTO2WL -12.035,18.7 r0 top
Designator43_8_3 "Comment" PROTO2WL -12.035,46.64 r0 top
Designator43_8_3_1 "Comment" PROTO2WL -12.035,16.16 r0 top
Designator43_8_4 "Comment" PROTO2WL -12.035,44.1 r0 top
Designator43_8_4_1 "Comment" PROTO2WL -12.035,13.62 r0 top
Designator43_8_4_1_1 "Comment" PROTO2WL -12.035,11.08 r0 top
Designator43_8_4_1_2 "Comment" PROTO2WL -12.035,8.54 r0 top
Designator43_8_6 "Comment" PROTO2WL -12.035,23.78 r0 top

## Footprints (in the part's own frame and the unit in brackets; to place one, negate y for a bottom-side part, rotate by r counter-clockwise, add the part's x,y. Pads: shape width x height; smd on the part's side, far side on the other; paste and mask are expansions set on the pad)
PROTO2WL [mm]
  oct 1.5x1.5 hole 1.1 unplated: 1(0,0)
  rect 1.016x2.159 smd far side: 1(0,0)
  rect 2.159x1.016 smd: 1(0,0)
  oct 1x1 all layers, no hole: 2(1.27,-1.27)
  oct 1x1.3 smd far side: 2(1.27,-1.27)
  oct 1.3x1 smd: 2(1.27,-1.27)
  Top Layer region: -0.375,-1.46 -0.178,-1.46 -0.178,-1.24 -0.375,-1.24
  Top Layer region: -0.375,-1.3 -0.178,-1.3 -0.178,-1.079 -0.375,-1.079
  Top Layer lines w0.381: -0.178,-1.27 0.843,-1.27
  Bottom Layer region: 1.079,0.375 1.079,0.178 1.3,0.178 1.3,0.375
  Bottom Layer region: 1.24,0.375 1.24,0.178 1.46,0.178 1.46,0.375
  Bottom Layer lines w0.381: 1.27,-0.843 1.27,0.178

## Free pads (board coordinates)
  rect 1.5x1.016 smd far side: 1(-86.027,8.54) 1(-86.027,11.08) 1(-86.027,13.62) 1(-86.027,16.16) 1(-86.027,18.7) 1(-86.027,21.24) 1(-86.027,23.78) 1(-86.027,41.56) 1(-86.027,44.1) 1(-86.027,46.64) 1(-86.027,49.18) 1(-86.027,51.72) 1(-86.027,54.26) 1(-86.027,56.8) 1(-75.867,28.86) 1(-75.867,31.4) 1(-75.867,33.94) 1(-75.867,36.48) 1(-4.083,8.54) 1(-4.083,11.08) 1(-4.083,13.62) 1(-4.083,16.16) 1(-4.083,18.7) 1(-4.083,21.24) 1(-4.083,23.78) 1(-4.083,41.56) 1(-4.083,44.1) 1(-4.083,46.64) 1(-4.083,49.18) 1(-4.083,51.72) 1(-4.083,54.26) 1(-4.083,56.8)
  rect 1.5x1.8 smd far side: 1(-86.001,28.988) 1(-86.001,36.352)
  round 5 hole 3: 1(-85.695,3.46) 1(-85.695,61.88) 1(-2.593,3.46) 1(-2.593,61.88)
  oct 1.5x1.5 hole 1.1 unplated: 1(-85.695,41.56) 1(-83.155,41.56) 1(-80.615,41.56) 1(-78.075,41.56) 1(-75.535,26.32) 1(-75.535,28.86) 1(-75.535,31.4) 1(-75.535,33.94) 1(-75.535,36.48) 1(-75.535,39.02) 1(-12.035,26.32) 1(-12.035,28.86) 1(-12.035,31.4) 1(-12.035,33.94) 1(-12.035,36.48) 1(-12.035,39.02) 1(-12.035,41.56) 1(-9.495,41.56) 1(-6.955,41.56) 1(-4.415,8.54) 1(-4.415,11.08) 1(-4.415,13.62) 1(-4.415,16.16) 1(-4.415,18.7) 1(-4.415,21.24) 1(-4.415,23.78) 1(-4.415,41.56) 1(-4.415,44.1) 1(-4.415,46.64) 1(-4.415,49.18) 1(-4.415,51.72) 1(-4.415,54.26) 1(-4.415,56.8)
  rect 1.016x2.159 smd far side: 1(-85.695,41.56) 1(-83.155,41.56) 1(-80.615,41.56) 1(-78.075,41.56) 1(-75.535,26.32) 1(-75.535,28.86) 1(-75.535,31.4) 1(-75.535,33.94) 1(-75.535,36.48) 1(-75.535,39.02) 1(-12.035,26.32) 1(-12.035,28.86) 1(-12.035,31.4) 1(-12.035,33.94) 1(-12.035,36.48) 1(-12.035,39.02) 1(-12.035,41.56) 1(-9.495,41.56) 1(-6.955,41.56) 1(-4.415,8.54) 1(-4.415,11.08) 1(-4.415,13.62) 1(-4.415,16.16) 1(-4.415,18.7) 1(-4.415,21.24) 1(-4.415,23.78) 1(-4.415,41.56) 1(-4.415,44.1) 1(-4.415,46.64) 1(-4.415,49.18) 1(-4.415,51.72) 1(-4.415,54.26) 1(-4.415,56.8)
  rect 2.159x1.016 smd: 1(-85.695,41.56) 1(-83.155,41.56) 1(-80.615,41.56) 1(-78.075,41.56) 1(-75.535,26.32) 1(-75.535,28.86) 1(-75.535,31.4) 1(-75.535,33.94) 1(-75.535,36.48) 1(-75.535,39.02) 1(-12.035,26.32) 1(-12.035,28.86) 1(-12.035,31.4) 1(-12.035,33.94) 1(-12.035,36.48) 1(-12.035,39.02) 1(-12.035,41.56) 1(-9.495,41.56) 1(-6.955,41.56) 1(-4.415,8.54) 1(-4.415,11.08) 1(-4.415,13.62) 1(-4.415,16.16) 1(-4.415,18.7) 1(-4.415,21.24) 1(-4.415,23.78) 1(-4.415,41.56) 1(-4.415,44.1) 1(-4.415,46.64) 1(-4.415,49.18) 1(-4.415,51.72) 1(-4.415,54.26) 1(-4.415,56.8)
  rect 1.016x1.5 smd: 1(-85.695,57.132) 1(-83.155,57.132) 1(-80.615,57.132) 1(-78.075,57.132) 1(-75.535,57.132) 1(-72.995,57.132) 1(-70.455,57.132) 1(-67.915,57.132) 1(-65.375,57.132) 1(-62.835,57.132) 1(-60.295,57.132) 1(-57.755,57.132) 1(-55.215,57.132) 1(-52.675,57.132) 1(-50.135,57.132) 1(-47.595,57.132) 1(-45.055,57.132) 1(-42.515,57.132) 1(-39.975,57.132) 1(-37.435,57.132) 1(-34.895,57.132) 1(-32.355,57.132) 1(-29.815,57.132) 1(-27.275,57.132) 1(-24.735,57.132) 1(-22.195,57.132) 1(-19.655,57.132) 1(-17.115,57.132) 1(-14.575,57.132) 1(-12.035,57.132) 1(-9.495,57.132) 1(-6.955,57.132) 1(-4.415,57.132)
  rect 1.4x0.305 smd far side: 1(-83.301,31.36) 2(-83.301,32.01) 3(-83.301,32.66) 4(-83.301,33.31) 5(-83.301,33.96)
  rect 2.3x0.5 smd far side: 1(-80.6,31.063) 2(-80.6,31.863) 3(-80.6,32.663) 5(-80.6,34.263)
  rect 0.762x1.524 smd: 1(-79.924,60.1) 1(-67.224,60.1) 1(-54.524,60.1) 1(-41.824,60.1) 1(-29.124,60.1) 1(-16.424,60.1) 2(-78.824,60.1) 2(-66.124,60.1) 2(-53.424,60.1) 2(-40.724,60.1) 2(-28.024,60.1) 2(-15.324,60.1) 3(-77.724,60.1) 3(-65.024,60.1) 3(-52.324,60.1) 3(-39.624,60.1) 3(-26.924,60.1) 3(-14.224,60.1) 4(-76.624,60.1) 4(-63.924,60.1) 4(-51.224,60.1) 4(-38.524,60.1) 4(-25.824,60.1) 4(-13.124,60.1) 5(-75.524,60.1) 5(-62.824,60.1) 5(-50.124,60.1) 5(-37.424,60.1) 5(-24.724,60.1) 5(-12.024,60.1) 6(-74.424,60.1) 6(-61.724,60.1) 6(-49.024,60.1) 6(-36.324,60.1) 6(-23.624,60.1) 6(-10.924,60.1) 7(-73.324,60.1) 7(-60.624,60.1) 7(-47.924,60.1) 7(-35.224,60.1) 7(-22.524,60.1) 7(-9.824,60.1) 8(-72.224,60.1) 8(-59.524,60.1) 8(-46.824,60.1) 8(-34.124,60.1) 8(-21.424,60.1) 8(-8.724,60.1) 9(-71.124,60.1) 9(-58.424,60.1) 9(-45.724,60.1) 9(-33.024,60.1) 9(-20.324,60.1) 9(-7.624,60.1)
  rect 0.7x0.7 hole 0.5: 1(-78.824,60.1) 1(-76.624,60.1) 1(-74.424,60.1) 1(-72.224,60.1) 1(-66.124,60.1) 1(-63.924,60.1) 1(-61.724,60.1) 1(-59.524,60.1) 1(-53.424,60.1) 1(-51.224,60.1) 1(-49.024,60.1) 1(-46.824,60.1) 1(-40.724,60.1) 1(-38.524,60.1) 1(-36.324,60.1) 1(-34.124,60.1) 1(-28.024,60.1) 1(-25.824,60.1) 1(-23.624,60.1) 1(-21.424,60.1) 1(-15.324,60.1) 1(-13.124,60.1) 1(-10.924,60.1) 1(-8.724,60.1)
  oct 1.5x1.6 hole 1: 1(-77.578,28.858) 4(-77.578,36.478)
  rect 0.762x1.524 smd far side: 1(-71.124,60.1) 1(-58.424,60.1) 1(-45.724,60.1) 1(-33.024,60.1) 1(-20.324,60.1) 1(-7.624,60.1) 2(-72.224,60.1) 2(-59.524,60.1) 2(-46.824,60.1) 2(-34.124,60.1) 2(-21.424,60.1) 2(-8.724,60.1) 3(-73.324,60.1) 3(-60.624,60.1) 3(-47.924,60.1) 3(-35.224,60.1) 3(-22.524,60.1) 3(-9.824,60.1) 4(-74.424,60.1) 4(-61.724,60.1) 4(-49.024,60.1) 4(-36.324,60.1) 4(-23.624,60.1) 4(-10.924,60.1) 5(-75.524,60.1) 5(-62.824,60.1) 5(-50.124,60.1) 5(-37.424,60.1) 5(-24.724,60.1) 5(-12.024,60.1) 6(-76.624,60.1) 6(-63.924,60.1) 6(-51.224,60.1) 6(-38.524,60.1) 6(-25.824,60.1) 6(-13.124,60.1) 7(-77.724,60.1) 7(-65.024,60.1) 7(-52.324,60.1) 7(-39.624,60.1) 7(-26.924,60.1) 7(-14.224,60.1) 8(-78.824,60.1) 8(-66.124,60.1) 8(-53.424,60.1) 8(-40.724,60.1) 8(-28.024,60.1) 8(-15.324,60.1) 9(-79.924,60.1) 9(-67.224,60.1) 9(-54.524,60.1) 9(-41.824,60.1) 9(-29.124,60.1) 9(-16.424,60.1)
  rect 1.5x0.8 all layers, no hole: 1(-9.989,26.32) 2(-9.989,28.86) 3(-9.989,31.4) 4(-9.989,33.94) 6(-9.989,39.02)
  oct 1.6x1.5 hole 1.1: 1(-9.495,26.32) 1(-4.415,30.054) 2(-9.495,28.86) 3(-9.495,31.4) 3(-4.415,32.594) 4(-9.495,33.94) 4(-1.875,32.594) 5(-9.495,36.48) 5(-4.415,35.134) 6(-9.495,39.02) 6(-1.875,35.134)
  oct 1.5x2 hole 1: 2(-77.578,31.398) 3(-77.578,33.938)
  oct 1x1 all layers, no hole: 2(-74.265,25.05) 2(-74.265,27.59) 2(-74.265,30.13) 2(-74.265,32.67) 2(-74.265,35.21) 2(-74.265,37.75)
  oct 1x1.3 smd far side: 2(-74.265,25.05) 2(-74.265,27.59) 2(-74.265,30.13) 2(-74.265,32.67) 2(-74.265,35.21) 2(-74.265,37.75)
  oct 1.3x1 smd: 2(-74.265,25.05) 2(-74.265,27.59) 2(-74.265,30.13) 2(-74.265,32.67) 2(-74.265,35.21) 2(-74.265,37.75)
  oct 1.5x1.6 hole 1.1: 2(-1.875,30.054)
  rect 2.3x0.457 smd far side: 4(-80.6,33.463)
  rect 1.5x0.8 all layers, no hole paste+0: 5(-9.989,36.48)
  rect 2.5x2 smd far side: 6(-80.7,37.113) 7(-86.2,37.113) 8(-80.7,28.213) 9(-86.2,28.213)
  oval 1.4x0.9 hole 0.9 unplated: MH1(-83.2,34.863) MH2(-83.2,30.463)
  rect 0x0 smd: P1(-83.26,33.995) P2(-83.26,33.345) P3(-83.26,32.695) P4(-83.26,32.045) P5(-83.26,31.395)
  round 1.524 hole 0.8 slot 1.5 at 0 deg: ""(-86.001,36.352) ""(-86.001,28.988)
  round 0.3 hole 0.5: ""(-83.801,30.76) ""(-83.801,34.56)
  rect 1.2x1.2 smd far side: ""(-83.268,29.178) ""(-83.268,36.213)